# Altium PCB layout.PcbDoc (part 6 of 11)
Units mil, origin at the board's own origin, x right, y up, seen from the top; angles counter-clockwise.
Board outline 3543.31 x 3149.61 mil, 2 copper layers (Top Layer, Bottom Layer); 78 components, 73 nets, 327 pads, 143 vias.
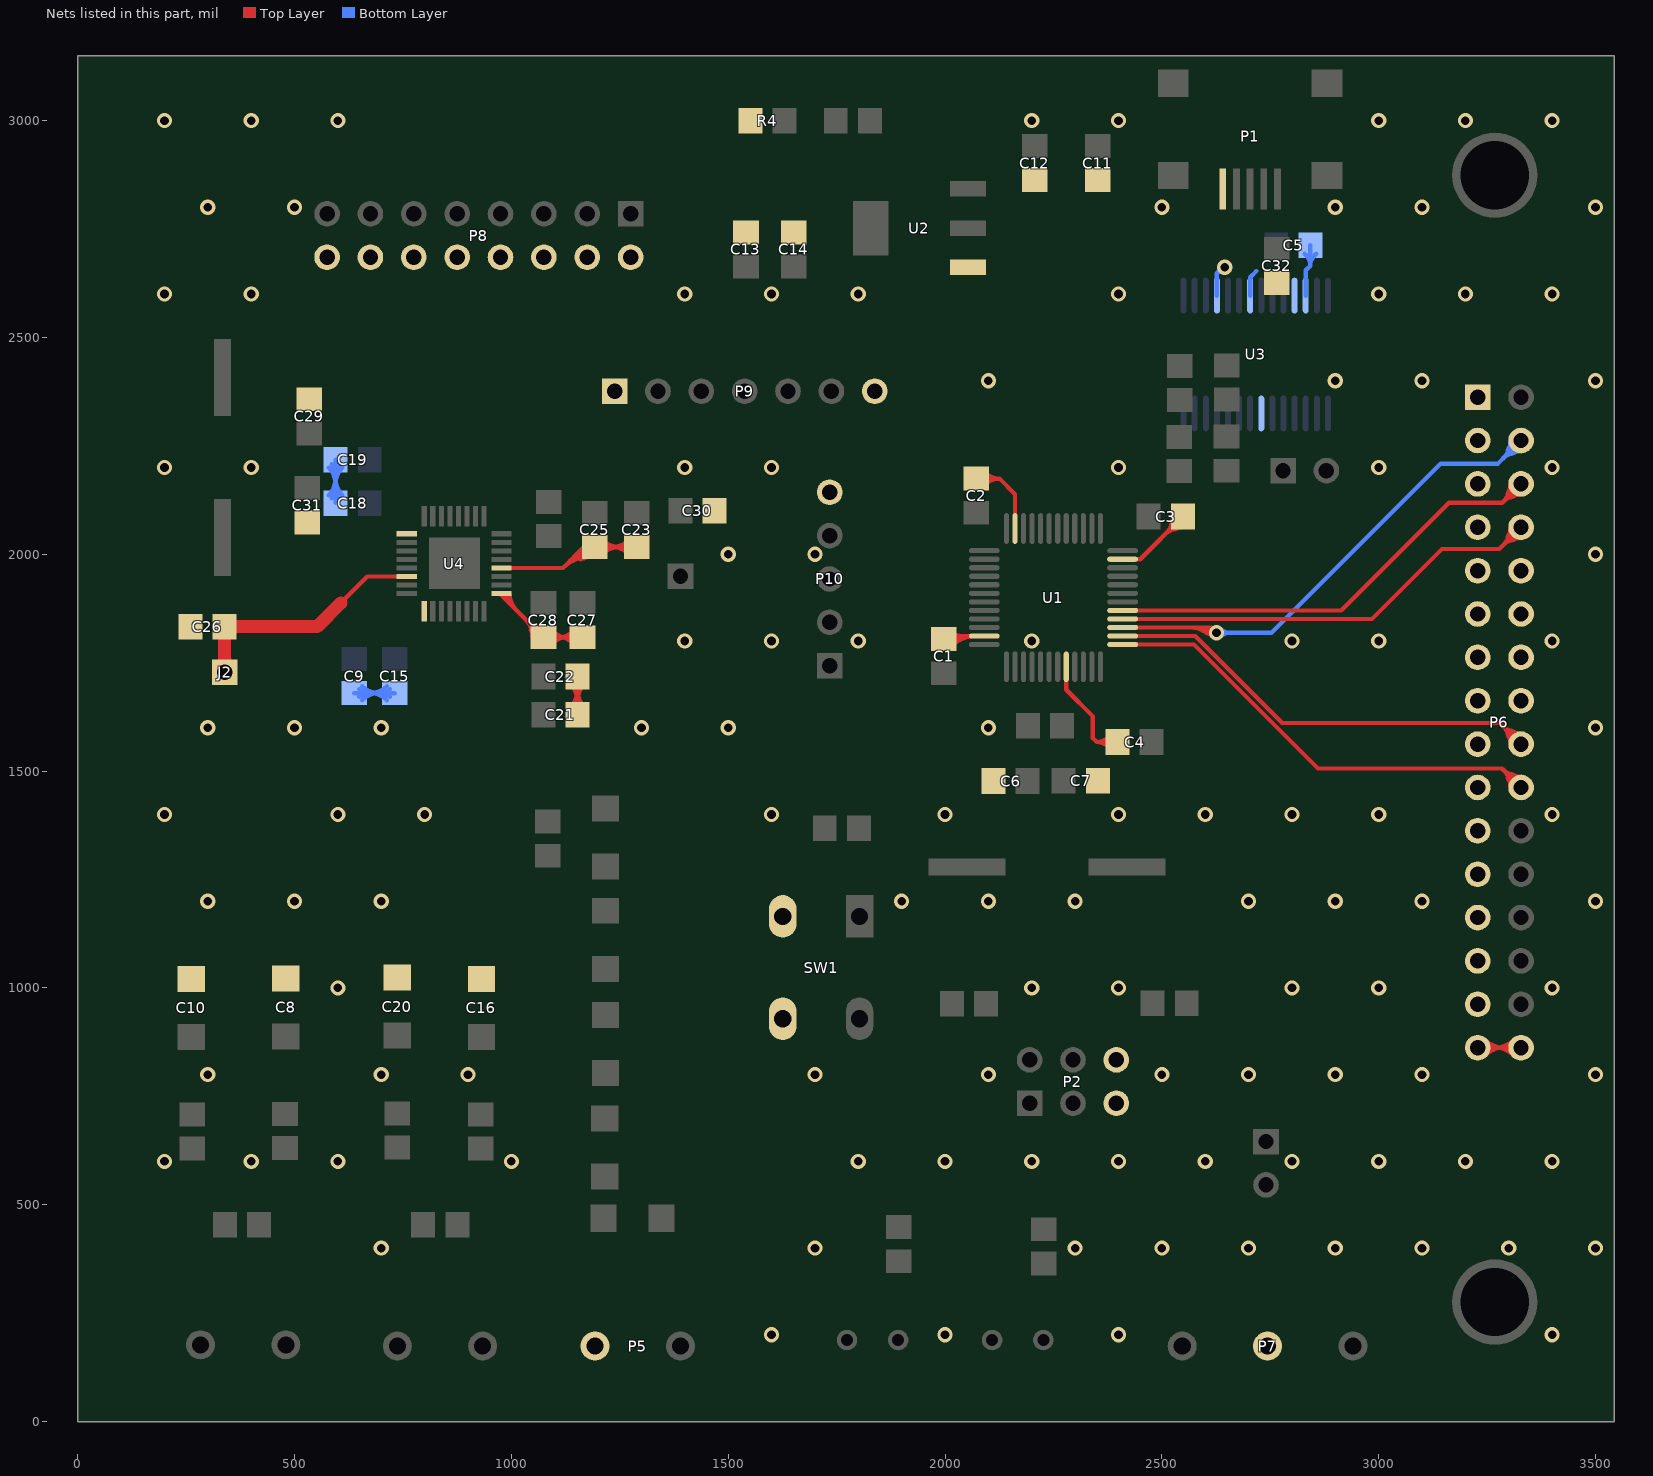
[diagram p6: the nets of this part, all layers, seen from the top]

## Via types
v1: diameter 35, hole 20, Top Layer to Bottom Layer, tented both sides, 113 vias
v2: diameter 35, hole 20, Top Layer to Bottom Layer, 28 vias
v3: diameter 35.43, hole 35.43, Top Layer to Bottom Layer, 2 vias

## Nets (pads, with @x,y where several pads share a name; then routed paths per layer and width w, separated by ;. In a path a pad name is that pad's centre, name@x,y a point inside that pad or via, vN(x,y) a via of type N, cw(c..) or ccw(c..) an arc to the next point about the centre after c; other vN are vias at no path point) (continued)
EFFEN_DOUT: P6.18 U1.14 | length 2613.7
  Top Layer w10: U1.14@2409.45,1811.42 2577.21,1811.42 2777.63,1611 3279.55,1611 P6.18@3328.35,1562.2 ; 3286.47,1604.08 cw(c3244.6,1562.2) P6.18@3303.82,1562.2 ; 3286.47,1604.08 ccw(c3328.35,1645.95) P6.18@3328.35,1586.73 ; 3286.47,1604.08 cw(c3244.6,1562.2) P6.18@3303.82,1562.2 ; 3286.47,1604.08 ccw(c3328.35,1645.95) P6.18@3328.35,1586.73 ; 3286.47,1604.08 cw(c3244.6,1562.2) P6.18@3303.82,1562.2 ; 3286.47,1604.08 ccw(c3328.35,1645.95) P6.18@3328.35,1586.73 ; 3286.47,1604.08 cw(c3244.6,1562.2) P6.18@3303.82,1562.2 ; 3286.47,1604.08 ccw(c3328.35,1645.95) P6.18@3328.35,1586.73 ; 3286.47,1604.08 cw(c3244.6,1562.2) P6.18@3303.82,1562.2 ; 3286.47,1604.08 ccw(c3328.35,1645.95) P6.18@3328.35,1586.73 ; 3297.83,1584.55 ccw(c3334.96,1594.5) P6.18@3327.25,1556.84 ; 3297.83,1584.55 ccw(c3334.96,1594.5) P6.18@3327.25,1556.84 ; 3297.83,1584.55 ccw(c3334.96,1594.5) P6.18@3327.25,1556.84 ; 3297.83,1584.55 ccw(c3334.96,1594.5) P6.18@3327.25,1556.84 ; 3297.83,1584.55 ccw(c3334.96,1594.5) P6.18@3327.25,1556.84 ; 3297.83,1584.55 ccw(c3334.96,1594.5) P6.18@3327.25,1556.84 ; 3297.83,1584.55 ccw(c3334.96,1594.5) P6.18@3327.25,1556.84 ; 3297.83,1584.55 ccw(c3334.96,1594.5) P6.18@3327.25,1556.84 ; 3297.83,1584.55 ccw(c3334.96,1594.5) P6.18@3327.25,1556.84 ; 3297.83,1584.55 ccw(c3334.96,1594.5) P6.18@3327.25,1556.84 ; 3303.55,1587 cw(c3278.75,1562.2) P6.18@3313.82,1562.2 ; 3303.55,1587 ccw(c3328.35,1611.8) P6.18@3328.35,1576.73 ; 3303.55,1587 cw(c3278.75,1562.2) P6.18@3313.82,1562.2 ; 3303.55,1587 ccw(c3328.35,1611.8) P6.18@3328.35,1576.73 ; 3303.55,1587 cw(c3278.75,1562.2) P6.18@3313.82,1562.2 ; 3303.55,1587 ccw(c3328.35,1611.8) P6.18@3328.35,1576.73 ; 3303.55,1587 cw(c3278.75,1562.2) P6.18@3313.82,1562.2 ; 3303.55,1587 ccw(c3328.35,1611.8) P6.18@3328.35,1576.73 ; 3303.55,1587 cw(c3278.75,1562.2) P6.18@3313.82,1562.2 ; 3303.55,1587 ccw(c3328.35,1611.8) P6.18@3328.35,1576.73 ; 3306,1592.72 cw(c3296.05,1555.59) P6.18@3333.71,1563.3 ; 3306,1592.72 cw(c3296.05,1555.59) P6.18@3333.71,1563.3 ; 3306,1592.72 cw(c3296.05,1555.59) P6.18@3333.71,1563.3 ; 3306,1592.72 cw(c3296.05,1555.59) P6.18@3333.71,1563.3 ; 3306,1592.72 cw(c3296.05,1555.59) P6.18@3333.71,1563.3 ; 3306,1592.72 cw(c3296.05,1555.59) P6.18@3333.71,1563.3 ; 3306,1592.72 cw(c3296.05,1555.59) P6.18@3333.71,1563.3 ; 3306,1592.72 cw(c3296.05,1555.59) P6.18@3333.71,1563.3 ; 3306,1592.72 cw(c3296.05,1555.59) P6.18@3333.71,1563.3 ; 3306,1592.72 cw(c3296.05,1555.59) P6.18@3333.71,1563.3
EFFEN_IRQ: P6.20 U1.13 | length 2647
  Top Layer w10: U1.13@2409.45,1791.73 2574.27,1791.73 2860,1506 3284.55,1506 P6.20@3328.35,1462.2 ; 3286.47,1504.08 cw(c3244.6,1462.2) P6.20@3303.82,1462.2 ; 3286.47,1504.08 ccw(c3328.35,1545.95) P6.20@3328.35,1486.73 ; 3286.47,1504.08 cw(c3244.6,1462.2) P6.20@3303.82,1462.2 ; 3286.47,1504.08 ccw(c3328.35,1545.95) P6.20@3328.35,1486.73 ; 3286.47,1504.08 cw(c3244.6,1462.2) P6.20@3303.82,1462.2 ; 3286.47,1504.08 ccw(c3328.35,1545.95) P6.20@3328.35,1486.73 ; 3286.47,1504.08 cw(c3244.6,1462.2) P6.20@3303.82,1462.2 ; 3286.47,1504.08 ccw(c3328.35,1545.95) P6.20@3328.35,1486.73 ; 3286.47,1504.08 cw(c3244.6,1462.2) P6.20@3303.82,1462.2 ; 3286.47,1504.08 ccw(c3328.35,1545.95) P6.20@3328.35,1486.73 ; 3297.83,1484.55 ccw(c3334.96,1494.5) P6.20@3327.25,1456.84 ; 3297.83,1484.55 ccw(c3334.96,1494.5) P6.20@3327.25,1456.84 ; 3297.83,1484.55 ccw(c3334.96,1494.5) P6.20@3327.25,1456.84 ; 3297.83,1484.55 ccw(c3334.96,1494.5) P6.20@3327.25,1456.84 ; 3297.83,1484.55 ccw(c3334.96,1494.5) P6.20@3327.25,1456.84 ; 3297.83,1484.55 ccw(c3334.96,1494.5) P6.20@3327.25,1456.84 ; 3297.83,1484.55 ccw(c3334.96,1494.5) P6.20@3327.25,1456.84 ; 3297.83,1484.55 ccw(c3334.96,1494.5) P6.20@3327.25,1456.84 ; 3297.83,1484.55 ccw(c3334.96,1494.5) P6.20@3327.25,1456.84 ; 3297.83,1484.55 ccw(c3334.96,1494.5) P6.20@3327.25,1456.84 ; 3303.55,1487 cw(c3278.75,1462.2) P6.20@3313.82,1462.2 ; 3303.55,1487 ccw(c3328.35,1511.8) P6.20@3328.35,1476.73 ; 3303.55,1487 cw(c3278.75,1462.2) P6.20@3313.82,1462.2 ; 3303.55,1487 ccw(c3328.35,1511.8) P6.20@3328.35,1476.73 ; 3303.55,1487 cw(c3278.75,1462.2) P6.20@3313.82,1462.2 ; 3303.55,1487 ccw(c3328.35,1511.8) P6.20@3328.35,1476.73 ; 3303.55,1487 cw(c3278.75,1462.2) P6.20@3313.82,1462.2 ; 3303.55,1487 ccw(c3328.35,1511.8) P6.20@3328.35,1476.73 ; 3303.55,1487 cw(c3278.75,1462.2) P6.20@3313.82,1462.2 ; 3303.55,1487 ccw(c3328.35,1511.8) P6.20@3328.35,1476.73 ; 3306,1492.72 cw(c3296.05,1455.59) P6.20@3333.71,1463.3 ; 3306,1492.72 cw(c3296.05,1455.59) P6.20@3333.71,1463.3 ; 3306,1492.72 cw(c3296.05,1455.59) P6.20@3333.71,1463.3 ; 3306,1492.72 cw(c3296.05,1455.59) P6.20@3333.71,1463.3 ; 3306,1492.72 cw(c3296.05,1455.59) P6.20@3333.71,1463.3 ; 3306,1492.72 cw(c3296.05,1455.59) P6.20@3333.71,1463.3 ; 3306,1492.72 cw(c3296.05,1455.59) P6.20@3333.71,1463.3 ; 3306,1492.72 cw(c3296.05,1455.59) P6.20@3333.71,1463.3 ; 3306,1492.72 cw(c3296.05,1455.59) P6.20@3333.71,1463.3 ; 3306,1492.72 cw(c3296.05,1455.59) P6.20@3333.71,1463.3
EFFEN_MISO: P6.8 U1.16 | length 2598
  Top Layer w10: U1.16@2409.45,1850.79 2984.79,1850.79 3146,2012 3278.14,2012 P6.8@3328.35,2062.2 ; 3286.47,2020.33 cw(c3328.35,1978.46) P6.8@3328.35,2037.68 ; 3286.47,2020.33 ccw(c3244.6,2062.2) P6.8@3303.82,2062.2 ; 3286.47,2020.33 cw(c3328.35,1978.46) P6.8@3328.35,2037.68 ; 3286.47,2020.33 ccw(c3244.6,2062.2) P6.8@3303.82,2062.2 ; 3286.47,2020.33 cw(c3328.35,1978.46) P6.8@3328.35,2037.68 ; 3286.47,2020.33 ccw(c3244.6,2062.2) P6.8@3303.82,2062.2 ; 3286.47,2020.33 cw(c3328.35,1978.46) P6.8@3328.35,2037.68 ; 3286.47,2020.33 ccw(c3244.6,2062.2) P6.8@3303.82,2062.2 ; 3286.47,2020.33 cw(c3328.35,1978.46) P6.8@3328.35,2037.68 ; 3286.47,2020.33 ccw(c3244.6,2062.2) P6.8@3303.82,2062.2 ; 3297.83,2039.86 cw(c3334.96,2029.91) P6.8@3327.25,2067.57 ; 3297.83,2039.86 cw(c3334.96,2029.91) P6.8@3327.25,2067.57 ; 3297.83,2039.86 cw(c3334.96,2029.91) P6.8@3327.25,2067.57 ; 3297.83,2039.86 cw(c3334.96,2029.91) P6.8@3327.25,2067.57 ; 3297.83,2039.86 cw(c3334.96,2029.91) P6.8@3327.25,2067.57 ; 3297.83,2039.86 cw(c3334.96,2029.91) P6.8@3327.25,2067.57 ; 3297.83,2039.86 cw(c3334.96,2029.91) P6.8@3327.25,2067.57 ; 3297.83,2039.86 cw(c3334.96,2029.91) P6.8@3327.25,2067.57 ; 3297.83,2039.86 cw(c3334.96,2029.91) P6.8@3327.25,2067.57 ; 3297.83,2039.86 cw(c3334.96,2029.91) P6.8@3327.25,2067.57 ; 3303.55,2037.4 cw(c3328.35,2012.6) P6.8@3328.35,2047.68 ; 3303.55,2037.4 ccw(c3278.75,2062.2) P6.8@3313.82,2062.2 ; 3303.55,2037.4 cw(c3328.35,2012.6) P6.8@3328.35,2047.68 ; 3303.55,2037.4 ccw(c3278.75,2062.2) P6.8@3313.82,2062.2 ; 3303.55,2037.4 cw(c3328.35,2012.6) P6.8@3328.35,2047.68 ; 3303.55,2037.4 ccw(c3278.75,2062.2) P6.8@3313.82,2062.2 ; 3303.55,2037.4 cw(c3328.35,2012.6) P6.8@3328.35,2047.68 ; 3303.55,2037.4 ccw(c3278.75,2062.2) P6.8@3313.82,2062.2 ; 3303.55,2037.4 cw(c3328.35,2012.6) P6.8@3328.35,2047.68 ; 3303.55,2037.4 ccw(c3278.75,2062.2) P6.8@3313.82,2062.2 ; 3306,2031.69 ccw(c3296.05,2068.82) P6.8@3333.71,2061.11 ; 3306,2031.69 ccw(c3296.05,2068.82) P6.8@3333.71,2061.11 ; 3306,2031.69 ccw(c3296.05,2068.82) P6.8@3333.71,2061.11 ; 3306,2031.69 ccw(c3296.05,2068.82) P6.8@3333.71,2061.11 ; 3306,2031.69 ccw(c3296.05,2068.82) P6.8@3333.71,2061.11 ; 3306,2031.69 ccw(c3296.05,2068.82) P6.8@3333.71,2061.11 ; 3306,2031.69 ccw(c3296.05,2068.82) P6.8@3333.71,2061.11 ; 3306,2031.69 ccw(c3296.05,2068.82) P6.8@3333.71,2061.11 ; 3306,2031.69 ccw(c3296.05,2068.82) P6.8@3333.71,2061.11 ; 3306,2031.69 ccw(c3296.05,2068.82) P6.8@3333.71,2061.11
EFFEN_MOSI: P6.6 U1.17 | length 2631.3
  Top Layer w10: U1.17@2409.45,1870.47 2913.47,1870.47 3162,2119 3285.14,2119 P6.6@3328.35,2162.2 ; 3286.47,2120.33 cw(c3328.35,2078.46) P6.6@3328.35,2137.68 ; 3286.47,2120.33 ccw(c3244.6,2162.2) P6.6@3303.82,2162.2 ; 3286.47,2120.33 cw(c3328.35,2078.46) P6.6@3328.35,2137.68 ; 3286.47,2120.33 ccw(c3244.6,2162.2) P6.6@3303.82,2162.2 ; 3286.47,2120.33 cw(c3328.35,2078.46) P6.6@3328.35,2137.68 ; 3286.47,2120.33 ccw(c3244.6,2162.2) P6.6@3303.82,2162.2 ; 3286.47,2120.33 cw(c3328.35,2078.46) P6.6@3328.35,2137.68 ; 3286.47,2120.33 ccw(c3244.6,2162.2) P6.6@3303.82,2162.2 ; 3286.47,2120.33 cw(c3328.35,2078.46) P6.6@3328.35,2137.68 ; 3286.47,2120.33 ccw(c3244.6,2162.2) P6.6@3303.82,2162.2 ; 3297.83,2139.86 cw(c3334.96,2129.91) P6.6@3327.25,2167.57 ; 3297.83,2139.86 cw(c3334.96,2129.91) P6.6@3327.25,2167.57 ; 3297.83,2139.86 cw(c3334.96,2129.91) P6.6@3327.25,2167.57 ; 3297.83,2139.86 cw(c3334.96,2129.91) P6.6@3327.25,2167.57 ; 3297.83,2139.86 cw(c3334.96,2129.91) P6.6@3327.25,2167.57 ; 3297.83,2139.86 cw(c3334.96,2129.91) P6.6@3327.25,2167.57 ; 3297.83,2139.86 cw(c3334.96,2129.91) P6.6@3327.25,2167.57 ; 3297.83,2139.86 cw(c3334.96,2129.91) P6.6@3327.25,2167.57 ; 3297.83,2139.86 cw(c3334.96,2129.91) P6.6@3327.25,2167.57 ; 3297.83,2139.86 cw(c3334.96,2129.91) P6.6@3327.25,2167.57 ; 3303.55,2137.4 cw(c3328.35,2112.6) P6.6@3328.35,2147.68 ; 3303.55,2137.4 ccw(c3278.75,2162.2) P6.6@3313.82,2162.2 ; 3303.55,2137.4 cw(c3328.35,2112.6) P6.6@3328.35,2147.68 ; 3303.55,2137.4 ccw(c3278.75,2162.2) P6.6@3313.82,2162.2 ; 3303.55,2137.4 cw(c3328.35,2112.6) P6.6@3328.35,2147.68 ; 3303.55,2137.4 ccw(c3278.75,2162.2) P6.6@3313.82,2162.2 ; 3303.55,2137.4 cw(c3328.35,2112.6) P6.6@3328.35,2147.68 ; 3303.55,2137.4 ccw(c3278.75,2162.2) P6.6@3313.82,2162.2 ; 3303.55,2137.4 cw(c3328.35,2112.6) P6.6@3328.35,2147.68 ; 3303.55,2137.4 ccw(c3278.75,2162.2) P6.6@3313.82,2162.2 ; 3306,2131.69 ccw(c3296.05,2168.82) P6.6@3333.71,2161.11 ; 3306,2131.69 ccw(c3296.05,2168.82) P6.6@3333.71,2161.11 ; 3306,2131.69 ccw(c3296.05,2168.82) P6.6@3333.71,2161.11 ; 3306,2131.69 ccw(c3296.05,2168.82) P6.6@3333.71,2161.11 ; 3306,2131.69 ccw(c3296.05,2168.82) P6.6@3333.71,2161.11 ; 3306,2131.69 ccw(c3296.05,2168.82) P6.6@3333.71,2161.11 ; 3306,2131.69 ccw(c3296.05,2168.82) P6.6@3333.71,2161.11 ; 3306,2131.69 ccw(c3296.05,2168.82) P6.6@3333.71,2161.11 ; 3306,2131.69 ccw(c3296.05,2168.82) P6.6@3333.71,2161.11 ; 3306,2131.69 ccw(c3296.05,2168.82) P6.6@3333.71,2161.11
EFFEN_SCLK: P6.4 U1.15 | length 4238.1
  Top Layer w10: U1.15@2409.45,1831.1 2613.9,1831.1 v2(2626,1819) ; 2566.61,1831.1 cw(c2566.61,1759.61) v2@2617.16,1810.16 ; 2566.61,1831.1 cw(c2566.61,1759.61) v2@2617.16,1810.16 ; 2566.61,1831.1 cw(c2566.61,1759.61) v2@2617.16,1810.16 ; 2566.61,1831.1 cw(c2566.61,1759.61) v2@2617.16,1810.16 ; 2566.61,1831.1 cw(c2566.61,1759.61) v2@2617.16,1810.16 ; 2590.75,1831.1 cw(c2590.75,1783.75) v2@2624.23,1817.23 ; 2590.75,1831.1 cw(c2590.75,1783.75) v2@2624.23,1817.23 ; 2590.75,1831.1 cw(c2590.75,1783.75) v2@2624.23,1817.23 ; 2590.75,1831.1 cw(c2590.75,1783.75) v2@2624.23,1817.23 ; 2590.75,1831.1 cw(c2590.75,1783.75) v2@2624.23,1817.23 ; 2591.15,1825.18 ccw(c2602.3,1844.5) v2@2617.49,1828.16 ; 2591.15,1825.18 ccw(c2602.3,1844.5) v2@2617.49,1828.16 ; 2591.15,1825.18 ccw(c2602.3,1844.5) v2@2617.49,1828.16 ; 2591.15,1825.18 ccw(c2602.3,1844.5) v2@2617.49,1828.16 ; 2591.15,1825.18 ccw(c2602.3,1844.5) v2@2617.49,1828.16 ; 2591.15,1825.18 ccw(c2602.3,1844.5) v2@2617.49,1828.16 ; 2591.15,1825.18 ccw(c2602.3,1844.5) v2@2617.49,1828.16 ; 2591.15,1825.18 ccw(c2602.3,1844.5) v2@2617.49,1828.16 ; 2591.15,1825.18 ccw(c2602.3,1844.5) v2@2617.49,1828.16 ; 2591.15,1825.18 ccw(c2602.3,1844.5) v2@2617.49,1828.16 ; 2602.87,1818.41 ccw(c2611.95,1834.12) v2@2624.3,1820.83 ; 2602.87,1818.41 ccw(c2611.95,1834.12) v2@2624.3,1820.83 ; 2602.87,1818.41 ccw(c2611.95,1834.12) v2@2624.3,1820.83 ; 2602.87,1818.41 ccw(c2611.95,1834.12) v2@2624.3,1820.83 ; 2602.87,1818.41 ccw(c2611.95,1834.12) v2@2624.3,1820.83 ; 2602.87,1818.41 ccw(c2611.95,1834.12) v2@2624.3,1820.83 ; 2602.87,1818.41 ccw(c2611.95,1834.12) v2@2624.3,1820.83 ; 2602.87,1818.41 ccw(c2611.95,1834.12) v2@2624.3,1820.83 ; 2602.87,1818.41 ccw(c2611.95,1834.12) v2@2624.3,1820.83 ; 2602.87,1818.41 ccw(c2611.95,1834.12) v2@2624.3,1820.83 ; 2604.21,1828.79 cw(c2593.94,1811) v2@2613.87,1815.97 ; 2604.21,1828.79 ccw(c2611.16,1840.82) v2@2618.97,1829.34 ; 2604.21,1828.79 cw(c2593.94,1811) v2@2613.87,1815.97 ; 2604.21,1828.79 ccw(c2611.16,1840.82) v2@2618.97,1829.34 ; 2604.21,1828.79 cw(c2593.94,1811) v2@2613.87,1815.97 ; 2604.21,1828.79 ccw(c2611.16,1840.82) v2@2618.97,1829.34 ; 2604.21,1828.79 cw(c2593.94,1811) v2@2613.87,1815.97 ; 2604.21,1828.79 ccw(c2611.16,1840.82) v2@2618.97,1829.34 ; 2604.21,1828.79 cw(c2593.94,1811) v2@2613.87,1815.97 ; 2604.21,1828.79 ccw(c2611.16,1840.82) v2@2618.97,1829.34 ; 2604.21,1828.79 cw(c2593.94,1811) v2@2613.87,1815.97 ; 2604.21,1828.79 ccw(c2611.16,1840.82) v2@2618.97,1829.34 ; 2604.21,1828.79 cw(c2593.94,1811) v2@2613.87,1815.97 ; 2604.21,1828.79 ccw(c2611.16,1840.82) v2@2618.97,1829.34 ; 2604.21,1828.79 cw(c2593.94,1811) v2@2613.87,1815.97 ; 2604.21,1828.79 ccw(c2611.16,1840.82) v2@2618.97,1829.34 ; 2604.21,1828.79 cw(c2593.94,1811) v2@2613.87,1815.97 ; 2604.21,1828.79 ccw(c2611.16,1840.82) v2@2618.97,1829.34 ; 2604.21,1828.79 cw(c2593.94,1811) v2@2613.87,1815.97 ; 2604.21,1828.79 ccw(c2611.16,1840.82) v2@2618.97,1829.34
  Bottom Layer w10: v2(2626,1819) 2753,1819 3143,2209 3275.14,2209 P6.4@3328.35,2262.2 ; v2@2634.84,1810.16 cw(c2656.18,1788.82) 2656.18,1819 ; v2@2634.84,1810.16 cw(c2656.18,1788.82) 2656.18,1819 ; v2@2634.84,1810.16 cw(c2656.18,1788.82) 2656.18,1819 ; v2@2634.84,1810.16 cw(c2656.18,1788.82) 2656.18,1819 ; v2@2634.84,1810.16 cw(c2656.18,1788.82) 2656.18,1819 ; v2@2634.84,1827.84 ccw(c2656.18,1849.18) 2656.18,1819 ; v2@2634.84,1827.84 ccw(c2656.18,1849.18) 2656.18,1819 ; v2@2634.84,1827.84 ccw(c2656.18,1849.18) 2656.18,1819 ; v2@2634.84,1827.84 ccw(c2656.18,1849.18) 2656.18,1819 ; v2@2634.84,1827.84 ccw(c2656.18,1849.18) 2656.18,1819 ; 3286.47,2220.33 cw(c3328.35,2178.46) P6.4@3328.35,2237.68 ; 3286.47,2220.33 ccw(c3244.6,2262.2) P6.4@3303.82,2262.2 ; 3286.47,2220.33 cw(c3328.35,2178.46) P6.4@3328.35,2237.68 ; 3286.47,2220.33 ccw(c3244.6,2262.2) P6.4@3303.82,2262.2 ; 3286.47,2220.33 cw(c3328.35,2178.46) P6.4@3328.35,2237.68 ; 3286.47,2220.33 ccw(c3244.6,2262.2) P6.4@3303.82,2262.2 ; 3286.47,2220.33 cw(c3328.35,2178.46) P6.4@3328.35,2237.68 ; 3286.47,2220.33 ccw(c3244.6,2262.2) P6.4@3303.82,2262.2 ; 3286.47,2220.33 cw(c3328.35,2178.46) P6.4@3328.35,2237.68 ; 3286.47,2220.33 ccw(c3244.6,2262.2) P6.4@3303.82,2262.2 ; 3297.83,2239.86 cw(c3334.96,2229.91) P6.4@3327.25,2267.57 ; 3297.83,2239.86 cw(c3334.96,2229.91) P6.4@3327.25,2267.57 ; 3297.83,2239.86 cw(c3334.96,2229.91) P6.4@3327.25,2267.57 ; 3297.83,2239.86 cw(c3334.96,2229.91) P6.4@3327.25,2267.57 ; 3297.83,2239.86 cw(c3334.96,2229.91) P6.4@3327.25,2267.57 ; 3297.83,2239.86 cw(c3334.96,2229.91) P6.4@3327.25,2267.57 ; 3297.83,2239.86 cw(c3334.96,2229.91) P6.4@3327.25,2267.57 ; 3297.83,2239.86 cw(c3334.96,2229.91) P6.4@3327.25,2267.57 ; 3297.83,2239.86 cw(c3334.96,2229.91) P6.4@3327.25,2267.57 ; 3297.83,2239.86 cw(c3334.96,2229.91) P6.4@3327.25,2267.57 ; 3303.55,2237.4 cw(c3328.35,2212.6) P6.4@3328.35,2247.68 ; 3303.55,2237.4 ccw(c3278.75,2262.2) P6.4@3313.82,2262.2 ; 3303.55,2237.4 cw(c3328.35,2212.6) P6.4@3328.35,2247.68 ; 3303.55,2237.4 ccw(c3278.75,2262.2) P6.4@3313.82,2262.2 ; 3303.55,2237.4 cw(c3328.35,2212.6) P6.4@3328.35,2247.68 ; 3303.55,2237.4 ccw(c3278.75,2262.2) P6.4@3313.82,2262.2 ; 3303.55,2237.4 cw(c3328.35,2212.6) P6.4@3328.35,2247.68 ; 3303.55,2237.4 ccw(c3278.75,2262.2) P6.4@3313.82,2262.2 ; 3303.55,2237.4 cw(c3328.35,2212.6) P6.4@3328.35,2247.68 ; 3303.55,2237.4 ccw(c3278.75,2262.2) P6.4@3313.82,2262.2 ; 3306,2231.69 ccw(c3296.05,2268.82) P6.4@3333.71,2261.11 ; 3306,2231.69 ccw(c3296.05,2268.82) P6.4@3333.71,2261.11 ; 3306,2231.69 ccw(c3296.05,2268.82) P6.4@3333.71,2261.11 ; 3306,2231.69 ccw(c3296.05,2268.82) P6.4@3333.71,2261.11 ; 3306,2231.69 ccw(c3296.05,2268.82) P6.4@3333.71,2261.11 ; 3306,2231.69 ccw(c3296.05,2268.82) P6.4@3333.71,2261.11 ; 3306,2231.69 ccw(c3296.05,2268.82) P6.4@3333.71,2261.11 ; 3306,2231.69 ccw(c3296.05,2268.82) P6.4@3333.71,2261.11 ; 3306,2231.69 ccw(c3296.05,2268.82) P6.4@3333.71,2261.11 ; 3306,2231.69 ccw(c3296.05,2268.82) P6.4@3333.71,2261.11
GND: C1.1 C2.1 C3.1 C4.1 C5.2 C6.2 C7.2 C8.2 C9.2 C10.1 C11.1 C12.1 C13.1 C14.1 C15.2 C16.2 C18.2 C19.2 C20.1 C21.2 C22.2 C23.2 C25.2 C26.2 C27.2 C28.2 C29.2 C30.2 C31.2 C32.1 P1.5 P2.5 P2.6 P5.1 P6.1 P6.3 P6.5 P6.7 P6.9 P6.10 P6.11 P6.12 P6.13 P6.14 P6.15 P6.16 P6.17 P6.19 P6.21 P6.23 P6.25 P6.27 P6.29 P6.31 P6.32 P7.2 P8.2 P8.4 P8.6 P8.8 P8.10 P8.12 P8.14 P8.16 P9.1 P9.7 P10.5 R4.1 SW1.3 SW1.4 U1.8 U1.23 U1.35 U1.47 U2.1 U3.7 U3.18 U3.21 U3.25 U3.26 U4.1 U4.9 U4.17 U4.20 | length 17708.6
  Top Layer w10: U4.17@977.23,1909.42 977.23,1905.4 C28.2@1074,1808.63 C27.2@1164,1808.63 ; U4.20@977.23,1968.47 1118.91,1968.47 1167.07,2016.63 C25.2@1192,2016.63 C23.2@1289,2016.63 ; C21.2@1152.37,1630 C22.2@1152.37,1718 ; C1.1@1997,1804.37 2004.05,1811.42 U1.47@2090.55,1811.42 ; C2.1@2072,2174.37 2125.63,2174.37 ; U1.35@2161.42,2059.45 2161.42,2138.58 2125.63,2174.37 ; U1.8@2279.53,1740.55 2279.53,1687.47 2341,1626 2341,1576 2350,1567 ; C4.1@2397.63,1567 2350,1567 ; U1.23@2409.45,1988.58 2449.95,1988.58 C3.1@2548.37,2087 ; P6.31@3228.35,862.2 P6.32@3328.35,862.2 ; U4.17@975.85,1909.42 ccw(c982.22,1909.42) U4.17@977.72,1904.91 ; U4.17@975.85,1909.42 ccw(c982.22,1909.42) U4.17@977.72,1904.91 ; U4.17@975.85,1909.42 ccw(c982.22,1909.42) U4.17@977.72,1904.91 ; U4.17@975.85,1909.42 ccw(c982.22,1909.42) U4.17@977.72,1904.91 ; U4.17@975.85,1909.42 ccw(c982.22,1909.42) U4.17@977.72,1904.91 ; U4.17@985.85,1909.42 ccw(c1016.36,1909.42) 994.79,1887.84 ; U4.17@985.85,1909.42 ccw(c1016.36,1909.42) 994.79,1887.84 ; U4.17@985.85,1909.42 ccw(c1016.36,1909.42) 994.79,1887.84 ; U4.17@985.85,1909.42 ccw(c1016.36,1909.42) 994.79,1887.84 ; U4.17@985.85,1909.42 ccw(c1016.36,1909.42) 994.79,1887.84 ; U4.17@995.85,1909.42 ccw(c1050.5,1909.42) 1011.86,1870.77 ; U4.17@995.85,1909.42 ccw(c1050.5,1909.42) 1011.86,1870.77 ; U4.17@995.85,1909.42 ccw(c1050.5,1909.42) 1011.86,1870.77 ; U4.17@995.85,1909.42 ccw(c1050.5,1909.42) 1011.86,1870.77 ; U4.17@995.85,1909.42 ccw(c1050.5,1909.42) 1011.86,1870.77 ; 1032.13,1850.5 cw(c990.26,1808.63) C28.2@1049.47,1808.63 ; 1032.13,1850.5 cw(c990.26,1808.63) C28.2@1049.47,1808.63 ; 1032.13,1850.5 cw(c990.26,1808.63) C28.2@1049.47,1808.63 ; 1032.13,1850.5 cw(c990.26,1808.63) C28.2@1049.47,1808.63 ; 1032.13,1850.5 cw(c990.26,1808.63) C28.2@1049.47,1808.63 ; 1036.88,1845.75 ccw(c1072.03,1880.9) C28.2@1072.03,1831.19 ; 1036.88,1845.75 ccw(c1072.03,1880.9) C28.2@1072.03,1831.19 ; 1036.88,1845.75 ccw(c1072.03,1880.9) C28.2@1072.03,1831.19 ; 1036.88,1845.75 ccw(c1072.03,1880.9) C28.2@1072.03,1831.19 ; 1036.88,1845.75 ccw(c1072.03,1880.9) C28.2@1072.03,1831.19 ; 1040.44,1842.36 ccw(c1082.67,1853.67) C28.2@1072.62,1811.12 ; 1040.44,1842.36 ccw(c1082.67,1853.67) C28.2@1072.62,1811.12 ; 1040.44,1842.36 ccw(c1082.67,1853.67) C28.2@1072.62,1811.12 ; 1040.44,1842.36 ccw(c1082.67,1853.67) C28.2@1072.62,1811.12 ; 1040.44,1842.36 ccw(c1082.67,1853.67) C28.2@1072.62,1811.12 ; 1040.44,1842.36 ccw(c1082.67,1853.67) C28.2@1072.62,1811.12 ; 1040.44,1842.36 ccw(c1082.67,1853.67) C28.2@1072.62,1811.12 ; 1040.44,1842.36 ccw(c1082.67,1853.67) C28.2@1072.62,1811.12 ; 1040.44,1842.36 ccw(c1082.67,1853.67) C28.2@1072.62,1811.12 ; 1040.44,1842.36 ccw(c1082.67,1853.67) C28.2@1072.62,1811.12 ; C28.2@1044.77,1826.19 ccw(c1078.3,1835.17) C28.2@1070.32,1801.39 ; C28.2@1044.77,1826.19 ccw(c1078.3,1835.17) C28.2@1070.32,1801.39 ; C28.2@1044.77,1826.19 ccw(c1078.3,1835.17) C28.2@1070.32,1801.39 ; C28.2@1044.77,1826.19 ccw(c1078.3,1835.17) C28.2@1070.32,1801.39 ; C28.2@1044.77,1826.19 ccw(c1078.3,1835.17) C28.2@1070.32,1801.39 ; C28.2@1044.77,1826.19 ccw(c1078.3,1835.17) C28.2@1070.32,1801.39 ; C28.2@1044.77,1826.19 ccw(c1078.3,1835.17) C28.2@1070.32,1801.39 ; C28.2@1044.77,1826.19 ccw(c1078.3,1835.17) C28.2@1070.32,1801.39 ; C28.2@1044.77,1826.19 ccw(c1078.3,1835.17) C28.2@1070.32,1801.39 ; C28.2@1044.77,1826.19 ccw(c1078.3,1835.17) C28.2@1070.32,1801.39 ; C28.2@1049.2,1833.43 cw(c1024.4,1808.63) C28.2@1059.47,1808.63 ; C28.2@1049.2,1833.43 cw(c1024.4,1808.63) C28.2@1059.47,1808.63 ; C28.2@1049.2,1833.43 cw(c1024.4,1808.63) C28.2@1059.47,1808.63 ; C28.2@1049.2,1833.43 cw(c1024.4,1808.63) C28.2@1059.47,1808.63 ; C28.2@1049.2,1833.43 cw(c1024.4,1808.63) C28.2@1059.47,1808.63 ; C28.2@1056.01,1835.48 cw(c1047.69,1804.44) C28.2@1079.36,1809.89 ; C28.2@1056.01,1835.48 cw(c1047.69,1804.44) C28.2@1079.36,1809.89 ; C28.2@1056.01,1835.48 cw(c1047.69,1804.44) C28.2@1079.36,1809.89 ; C28.2@1056.01,1835.48 cw(c1047.69,1804.44) C28.2@1079.36,1809.89 ; C28.2@1056.01,1835.48 cw(c1047.69,1804.44) C28.2@1079.36,1809.89 ; C28.2@1056.01,1835.48 cw(c1047.69,1804.44) C28.2@1079.36,1809.89 ; C28.2@1056.01,1835.48 cw(c1047.69,1804.44) C28.2@1079.36,1809.89 ; C28.2@1056.01,1835.48 cw(c1047.69,1804.44) C28.2@1079.36,1809.89 ; C28.2@1056.01,1835.48 cw(c1047.69,1804.44) C28.2@1079.36,1809.89 ; C28.2@1056.01,1835.48 cw(c1047.69,1804.44) C28.2@1079.36,1809.89 ; C28.2@1084.85,1799.75 cw(c1106.29,1778.31) 1106.29,1808.63 ; C28.2@1084.85,1799.75 cw(c1106.29,1778.31) 1106.29,1808.63 ; C28.2@1084.85,1799.75 cw(c1106.29,1778.31) 1106.29,1808.63 ; C28.2@1084.85,1799.75 cw(c1106.29,1778.31) 1106.29,1808.63 ; C28.2@1084.85,1799.75 cw(c1106.29,1778.31) 1106.29,1808.63 ; C28.2@1084.85,1817.51 ccw(c1106.29,1838.95) 1106.29,1808.63 ; C28.2@1084.85,1817.51 ccw(c1106.29,1838.95) 1106.29,1808.63 ; C28.2@1084.85,1817.51 ccw(c1106.29,1838.95) 1106.29,1808.63 ; C28.2@1084.85,1817.51 ccw(c1106.29,1838.95) 1106.29,1808.63 ; C28.2@1084.85,1817.51 ccw(c1106.29,1838.95) 1106.29,1808.63 ; C28.2@1091.92,1792.68 cw(c1130.43,1754.17) 1130.43,1808.63 ; C28.2@1091.92,1792.68 cw(c1130.43,1754.17) 1130.43,1808.63 ; C28.2@1091.92,1792.68 cw(c1130.43,1754.17) 1130.43,1808.63 ; C28.2@1091.92,1792.68 cw(c1130.43,1754.17) 1130.43,1808.63 ; C28.2@1091.92,1792.68 cw(c1130.43,1754.17) 1130.43,1808.63 ; C28.2@1091.92,1824.58 ccw(c1130.43,1863.09) 1130.43,1808.63 ; C28.2@1091.92,1824.58 ccw(c1130.43,1863.09) 1130.43,1808.63 ; C28.2@1091.92,1824.58 ccw(c1130.43,1863.09) 1130.43,1808.63 ; C28.2@1091.92,1824.58 ccw(c1130.43,1863.09) 1130.43,1808.63 ; C28.2@1091.92,1824.58 ccw(c1130.43,1863.09) 1130.43,1808.63 ; 1107.57,1808.63 cw(c1107.57,1754.17) C27.2@1146.08,1792.68 ; 1107.57,1808.63 ccw(c1107.57,1863.09) C27.2@1146.08,1824.58 ; 1107.57,1808.63 cw(c1107.57,1754.17) C27.2@1146.08,1792.68 ; 1107.57,1808.63 ccw(c1107.57,1863.09) C27.2@1146.08,1824.58 ; 1107.57,1808.63 cw(c1107.57,1754.17) C27.2@1146.08,1792.68 ; 1107.57,1808.63 ccw(c1107.57,1863.09) C27.2@1146.08,1824.58 ; 1107.57,1808.63 cw(c1107.57,1754.17) C27.2@1146.08,1792.68 ; 1107.57,1808.63 ccw(c1107.57,1863.09) C27.2@1146.08,1824.58 ; 1107.57,1808.63 cw(c1107.57,1754.17) C27.2@1146.08,1792.68 ; 1107.57,1808.63 ccw(c1107.57,1863.09) C27.2@1146.08,1824.58 ; 1118.92,1968.48 cw(c1181.5,1905.89) C25.2@1188.3,1994.14 ; 1118.92,1968.48 cw(c1181.5,1905.89) C25.2@1188.3,1994.14 ; 1118.92,1968.48 cw(c1181.5,1905.89) C25.2@1188.3,1994.14 ; 1118.92,1968.48 cw(c1181.5,1905.89) C25.2@1188.3,1994.14 ; 1118.92,1968.48 cw(c1181.5,1905.89) C25.2@1188.3,1994.14 ; 1131.71,1808.63 cw(c1131.71,1778.31) C27.2@1153.15,1799.75 ; 1131.71,1808.63 ccw(c1131.71,1838.95) C27.2@1153.15,1817.51 ; 1131.71,1808.63 cw(c1131.71,1778.31) C27.2@1153.15,1799.75 ; 1131.71,1808.63 ccw(c1131.71,1838.95) C27.2@1153.15,1817.51 ; 1131.71,1808.63 cw(c1131.71,1778.31) C27.2@1153.15,1799.75 ; 1131.71,1808.63 ccw(c1131.71,1838.95) C27.2@1153.15,1817.51 ; 1131.71,1808.63 cw(c1131.71,1778.31) C27.2@1153.15,1799.75 ; 1131.71,1808.63 ccw(c1131.71,1838.95) C27.2@1153.15,1817.51 ; 1131.71,1808.63 cw(c1131.71,1778.31) C27.2@1153.15,1799.75 ; 1131.71,1808.63 ccw(c1131.71,1838.95) C27.2@1153.15,1817.51 ; 1134.29,1983.85 cw(c1183.7,1934.44) C25.2@1189.07,2004.11 ; 1134.29,1983.85 cw(c1183.7,1934.44) C25.2@1189.07,2004.11 ; 1134.29,1983.85 cw(c1183.7,1934.44) C25.2@1189.07,2004.11 ; 1134.29,1983.85 cw(c1183.7,1934.44) C25.2@1189.07,2004.11 ; 1134.29,1983.85 cw(c1183.7,1934.44) C25.2@1189.07,2004.11 ; C21.2@1136.42,1647.92 ccw(c1097.91,1686.43) 1152.37,1686.43 ; C21.2@1136.42,1647.92 ccw(c1097.91,1686.43) 1152.37,1686.43 ; C21.2@1136.42,1647.92 ccw(c1097.91,1686.43) 1152.37,1686.43 ; C21.2@1136.42,1647.92 ccw(c1097.91,1686.43) 1152.37,1686.43 ; C21.2@1136.42,1647.92 ccw(c1097.91,1686.43) 1152.37,1686.43 ; C22.2@1136.42,1700.08 cw(c1097.91,1661.57) 1152.37,1661.57 ; C22.2@1136.42,1700.08 cw(c1097.91,1661.57) 1152.37,1661.57 ; C22.2@1136.42,1700.08 cw(c1097.91,1661.57) 1152.37,1661.57 ; C22.2@1136.42,1700.08 cw(c1097.91,1661.57) 1152.37,1661.57 ; C22.2@1136.42,1700.08 cw(c1097.91,1661.57) 1152.37,1661.57 ; C21.2@1143.49,1640.85 ccw(c1122.05,1662.29) 1152.37,1662.29 ; C21.2@1143.49,1640.85 ccw(c1122.05,1662.29) 1152.37,1662.29 ; C21.2@1143.49,1640.85 ccw(c1122.05,1662.29) 1152.37,1662.29 ; C21.2@1143.49,1640.85 ccw(c1122.05,1662.29) 1152.37,1662.29 ; C21.2@1143.49,1640.85 ccw(c1122.05,1662.29) 1152.37,1662.29 ; C22.2@1143.49,1707.15 cw(c1122.05,1685.71) 1152.37,1685.71 ; C22.2@1143.49,1707.15 cw(c1122.05,1685.71) 1152.37,1685.71 ; C22.2@1143.49,1707.15 cw(c1122.05,1685.71) 1152.37,1685.71 ; C22.2@1143.49,1707.15 cw(c1122.05,1685.71) 1152.37,1685.71 ; C22.2@1143.49,1707.15 cw(c1122.05,1685.71) 1152.37,1685.71 ; 1149.66,1999.22 cw(c1185.9,1962.98) C25.2@1189.84,2014.08 ; 1149.66,1999.22 cw(c1185.9,1962.98) C25.2@1189.84,2014.08 ; 1149.66,1999.22 cw(c1185.9,1962.98) C25.2@1189.84,2014.08 ; 1149.66,1999.22 cw(c1185.9,1962.98) C25.2@1189.84,2014.08 ; 1149.66,1999.22 cw(c1185.9,1962.98) C25.2@1189.84,2014.08 ; 1152.37,1661.57 cw(c1206.83,1661.57) C22.2@1168.32,1700.08 ; 1152.37,1661.57 cw(c1206.83,1661.57) C22.2@1168.32,1700.08 ; 1152.37,1661.57 cw(c1206.83,1661.57) C22.2@1168.32,1700.08 ; 1152.37,1661.57 cw(c1206.83,1661.57) C22.2@1168.32,1700.08 ; 1152.37,1661.57 cw(c1206.83,1661.57) C22.2@1168.32,1700.08 ; 1152.37,1662.29 ccw(c1182.69,1662.29) C21.2@1161.25,1640.85 ; 1152.37,1662.29 ccw(c1182.69,1662.29) C21.2@1161.25,1640.85 ; 1152.37,1662.29 ccw(c1182.69,1662.29) C21.2@1161.25,1640.85 ; 1152.37,1662.29 ccw(c1182.69,1662.29) C21.2@1161.25,1640.85 ; 1152.37,1662.29 ccw(c1182.69,1662.29) C21.2@1161.25,1640.85 ; 1152.37,1685.71 cw(c1182.69,1685.71) C22.2@1161.25,1707.15 ; 1152.37,1685.71 cw(c1182.69,1685.71) C22.2@1161.25,1707.15 ; 1152.37,1685.71 cw(c1182.69,1685.71) C22.2@1161.25,1707.15 ; 1152.37,1685.71 cw(c1182.69,1685.71) C22.2@1161.25,1707.15 ; 1152.37,1685.71 cw(c1182.69,1685.71) C22.2@1161.25,1707.15 ; 1152.37,1686.43 ccw(c1206.83,1686.43) C21.2@1168.32,1647.92 ; 1152.37,1686.43 ccw(c1206.83,1686.43) C21.2@1168.32,1647.92 ; 1152.37,1686.43 ccw(c1206.83,1686.43) C21.2@1168.32,1647.92 ; 1152.37,1686.43 ccw(c1206.83,1686.43) C21.2@1168.32,1647.92 ; 1152.37,1686.43 ccw(c1206.83,1686.43) C21.2@1168.32,1647.92 ; 1159.99,1988.84 ccw(c1149.61,2044.31) C25.2@1196.17,2012.43 ; 1159.99,1988.84 ccw(c1149.61,2044.31) C25.2@1196.17,2012.43 ; 1159.99,1988.84 ccw(c1149.61,2044.31) C25.2@1196.17,2012.43 ; 1159.99,1988.84 ccw(c1149.61,2044.31) C25.2@1196.17,2012.43 ; 1159.99,1988.84 ccw(c1149.61,2044.31) C25.2@1196.17,2012.43 ; 1159.99,1988.84 ccw(c1149.61,2044.31) C25.2@1196.17,2012.43 ; 1159.99,1988.84 ccw(c1149.61,2044.31) C25.2@1196.17,2012.43 ; 1159.99,1988.84 ccw(c1149.61,2044.31) C25.2@1196.17,2012.43 ; 1159.99,1988.84 ccw(c1149.61,2044.31) C25.2@1196.17,2012.43 ; 1159.99,1988.84 ccw(c1149.61,2044.31) C25.2@1196.17,2012.43 ; C25.2@1162.83,1999.2 ccw(c1156.34,2033.9) C25.2@1187.75,2017.8 ; C25.2@1162.83,1999.2 ccw(c1156.34,2033.9) C25.2@1187.75,2017.8 ; C25.2@1162.83,1999.2 ccw(c1156.34,2033.9) C25.2@1187.75,2017.8 ; C25.2@1162.83,1999.2 ccw(c1156.34,2033.9) C25.2@1187.75,2017.8 ; C25.2@1162.83,1999.2 ccw(c1156.34,2033.9) C25.2@1187.75,2017.8 ; C25.2@1162.83,1999.2 ccw(c1156.34,2033.9) C25.2@1187.75,2017.8 ; C25.2@1162.83,1999.2 ccw(c1156.34,2033.9) C25.2@1187.75,2017.8 ; C25.2@1162.83,1999.2 ccw(c1156.34,2033.9) C25.2@1187.75,2017.8 ; C25.2@1162.83,1999.2 ccw(c1156.34,2033.9) C25.2@1187.75,2017.8 ; C25.2@1162.83,1999.2 ccw(c1156.34,2033.9) C25.2@1187.75,2017.8 ; C25.2@1167.52,2000.08 cw(c1169.91,1987.25) C25.2@1177.29,1998.02 ; C25.2@1167.52,2000.08 cw(c1169.91,1987.25) C25.2@1177.29,1998.02 ; C25.2@1167.52,2000.08 cw(c1169.91,1987.25) C25.2@1177.29,1998.02 ; C25.2@1167.52,2000.08 cw(c1169.91,1987.25) C25.2@1177.29,1998.02 ; C25.2@1167.52,2000.08 cw(c1169.91,1987.25) C25.2@1177.29,1998.02 ; C25.2@1167.52,2000.08 cw(c1169.91,1987.25) C25.2@1177.29,1998.02 ; C25.2@1167.52,2000.08 cw(c1169.91,1987.25) C25.2@1177.29,1998.02 ; C25.2@1167.52,2000.08 cw(c1169.91,1987.25) C25.2@1177.29,1998.02 ; C25.2@1167.52,2000.08 cw(c1169.91,1987.25) C25.2@1177.29,1998.02 ; C25.2@1167.52,2000.08 cw(c1169.91,1987.25) C25.2@1177.29,1998.02 ; C25.2@1202.85,2007.75 cw(c1224.29,1986.31) 1224.29,2016.63 ; C25.2@1202.85,2007.75 cw(c1224.29,1986.31) 1224.29,2016.63 ; C25.2@1202.85,2007.75 cw(c1224.29,1986.31) 1224.29,2016.63 ; C25.2@1202.85,2007.75 cw(c1224.29,1986.31) 1224.29,2016.63 ; C25.2@1202.85,2007.75 cw(c1224.29,1986.31) 1224.29,2016.63 ; C25.2@1202.85,2025.51 ccw(c1224.29,2046.95) 1224.29,2016.63 ; C25.2@1202.85,2025.51 ccw(c1224.29,2046.95) 1224.29,2016.63 ; C25.2@1202.85,2025.51 ccw(c1224.29,2046.95) 1224.29,2016.63 ; C25.2@1202.85,2025.51 ccw(c1224.29,2046.95) 1224.29,2016.63 ; C25.2@1202.85,2025.51 ccw(c1224.29,2046.95) 1224.29,2016.63 ; C25.2@1209.92,2000.68 cw(c1248.43,1962.17) 1248.43,2016.63 ; C25.2@1209.92,2000.68 cw(c1248.43,1962.17) 1248.43,2016.63 ; C25.2@1209.92,2000.68 cw(c1248.43,1962.17) 1248.43,2016.63 ; C25.2@1209.92,2000.68 cw(c1248.43,1962.17) 1248.43,2016.63 ; C25.2@1209.92,2000.68 cw(c1248.43,1962.17) 1248.43,2016.63 ; C25.2@1209.92,2032.58 ccw(c1248.43,2071.09) 1248.43,2016.63 ; C25.2@1209.92,2032.58 ccw(c1248.43,2071.09) 1248.43,2016.63 ; C25.2@1209.92,2032.58 ccw(c1248.43,2071.09) 1248.43,2016.63 ; C25.2@1209.92,2032.58 ccw(c1248.43,2071.09) 1248.43,2016.63 ; C25.2@1209.92,2032.58 ccw(c1248.43,2071.09) 1248.43,2016.63 ; 1232.57,2016.63 cw(c1232.57,1962.17) C23.2@1271.08,2000.68 ; 1232.57,2016.63 ccw(c1232.57,2071.09) C23.2@1271.08,2032.58 ; 1232.57,2016.63 cw(c1232.57,1962.17) C23.2@1271.08,2000.68 ; 1232.57,2016.63 ccw(c1232.57,2071.09) C23.2@1271.08,2032.58 ; 1232.57,2016.63 cw(c1232.57,1962.17) C23.2@1271.08,2000.68 ; 1232.57,2016.63 ccw(c1232.57,2071.09) C23.2@1271.08,2032.58 ; 1232.57,2016.63 cw(c1232.57,1962.17) C23.2@1271.08,2000.68 ; 1232.57,2016.63 ccw(c1232.57,2071.09) C23.2@1271.08,2032.58 ; 1232.57,2016.63 cw(c1232.57,1962.17) C23.2@1271.08,2000.68 ; 1232.57,2016.63 ccw(c1232.57,2071.09) C23.2@1271.08,2032.58 ; 1256.71,2016.63 cw(c1256.71,1986.31) C23.2@1278.15,2007.75 ; 1256.71,2016.63 ccw(c1256.71,2046.95) C23.2@1278.15,2025.51 ; 1256.71,2016.63 cw(c1256.71,1986.31) C23.2@1278.15,2007.75 ; 1256.71,2016.63 ccw(c1256.71,2046.95) C23.2@1278.15,2025.51 ; 1256.71,2016.63 cw(c1256.71,1986.31) C23.2@1278.15,2007.75 ; 1256.71,2016.63 ccw(c1256.71,2046.95) C23.2@1278.15,2025.51 ; 1256.71,2016.63 cw(c1256.71,1986.31) C23.2@1278.15,2007.75 ; 1256.71,2016.63 ccw(c1256.71,2046.95) C23.2@1278.15,2025.51 ; 1256.71,2016.63 cw(c1256.71,1986.31) C23.2@1278.15,2007.75 ; 1256.71,2016.63 ccw(c1256.71,2046.95) C23.2@1278.15,2025.51 ; C1.1@2007.85,1795.49 cw(c2046.3,1757.03) 2046.3,1811.42 ; C1.1@2007.85,1795.49 cw(c2046.3,1757.03) 2046.3,1811.42 ; C1.1@2007.85,1795.49 cw(c2046.3,1757.03) 2046.3,1811.42 ; C1.1@2007.85,1795.49 cw(c2046.3,1757.03) 2046.3,1811.42 ; C1.1@2007.85,1795.49 cw(c2046.3,1757.03) 2046.3,1811.42 ; C1.1@2014.92,1788.42 cw(c2070.45,1732.89) U1.47@2070.45,1811.42 ; C1.1@2014.92,1788.42 cw(c2070.45,1732.89) U1.47@2070.45,1811.42 ; C1.1@2014.92,1788.42 cw(c2070.45,1732.89) U1.47@2070.45,1811.42 ; C1.1@2014.92,1788.42 cw(c2070.45,1732.89) U1.47@2070.45,1811.42 ; C1.1@2014.92,1788.42 cw(c2070.45,1732.89) U1.47@2070.45,1811.42 ; C1.1@2014.92,1820.32 ccw(c2036.42,1841.82) 2036.42,1811.42 ; C1.1@2014.92,1820.32 ccw(c2036.42,1841.82) 2036.42,1811.42 ; C1.1@2014.92,1820.32 ccw(c2036.42,1841.82) 2036.42,1811.42 ; C1.1@2014.92,1820.32 ccw(c2036.42,1841.82) 2036.42,1811.42 ; C1.1@2014.92,1820.32 ccw(c2036.42,1841.82) 2036.42,1811.42 ; C2.1@2083.18,2165.83 cw(c2102.73,2147.72) 2102.73,2174.37 ; C2.1@2083.18,2165.83 cw(c2102.73,2147.72) 2102.73,2174.37 ; C2.1@2083.18,2165.83 cw(c2102.73,2147.72) 2102.73,2174.37 ; C2.1@2083.18,2165.83 cw(c2102.73,2147.72) 2102.73,2174.37 ; C2.1@2083.18,2165.83 cw(c2102.73,2147.72) 2102.73,2174.37 ; C2.1@2083.18,2182.91 ccw(c2102.73,2201.02) 2102.73,2174.37 ; C2.1@2083.18,2182.91 ccw(c2102.73,2201.02) 2102.73,2174.37 ; C2.1@2083.18,2182.91 ccw(c2102.73,2201.02) 2102.73,2174.37 ; C2.1@2083.18,2182.91 ccw(c2102.73,2201.02) 2102.73,2174.37 ; C2.1@2083.18,2182.91 ccw(c2102.73,2201.02) 2102.73,2174.37 ; C2.1@2090.52,2159.04 cw(c2125.63,2126.5) 2125.63,2174.37 ; C2.1@2090.52,2159.04 cw(c2125.63,2126.5) 2125.63,2174.37 ; C2.1@2090.52,2159.04 cw(c2125.63,2126.5) 2125.63,2174.37 ; C2.1@2090.52,2159.04 cw(c2125.63,2126.5) 2125.63,2174.37 ; C2.1@2090.52,2159.04 cw(c2125.63,2126.5) 2125.63,2174.37 ; C2.1@2090.52,2189.7 ccw(c2125.63,2222.24) 2125.63,2174.37 ; C2.1@2090.52,2189.7 ccw(c2125.63,2222.24) 2125.63,2174.37 ; C2.1@2090.52,2189.7 ccw(c2125.63,2222.24) 2125.63,2174.37 ; C2.1@2090.52,2189.7 ccw(c2125.63,2222.24) 2125.63,2174.37 ; C2.1@2090.52,2189.7 ccw(c2125.63,2222.24) 2125.63,2174.37 ; 2350,1567 cw(c2350,1528) C4.1@2380.18,1552.71 ; 2350,1567 ccw(c2350,1606) C4.1@2380.18,1581.29 ; 2350,1567 cw(c2350,1528) C4.1@2380.18,1552.71 ; 2350,1567 ccw(c2350,1606) C4.1@2380.18,1581.29 ; 2350,1567 cw(c2350,1528) C4.1@2380.18,1552.71 ; 2350,1567 ccw(c2350,1606) C4.1@2380.18,1581.29 ; 2350,1567 cw(c2350,1528) C4.1@2380.18,1552.71 ; 2350,1567 ccw(c2350,1606) C4.1@2380.18,1581.29 ; 2350,1567 cw(c2350,1528) C4.1@2380.18,1552.71 ; 2350,1567 ccw(c2350,1606) C4.1@2380.18,1581.29 ; 2506.5,2045.13 cw(c2548.37,2003.26) C3.1@2548.37,2062.47 ; 2506.5,2045.13 cw(c2548.37,2003.26) C3.1@2548.37,2062.47 ; 2506.5,2045.13 cw(c2548.37,2003.26) C3.1@2548.37,2062.47 ; 2506.5,2045.13 cw(c2548.37,2003.26) C3.1@2548.37,2062.47 ; 2506.5,2045.13 cw(c2548.37,2003.26) C3.1@2548.37,2062.47 ; 2511.25,2049.88 ccw(c2476.1,2085.03) C3.1@2525.81,2085.03 ; 2511.25,2049.88 ccw(c2476.1,2085.03) C3.1@2525.81,2085.03 ; 2511.25,2049.88 ccw(c2476.1,2085.03) C3.1@2525.81,2085.03 ; 2511.25,2049.88 ccw(c2476.1,2085.03) C3.1@2525.81,2085.03 ; 2511.25,2049.88 ccw(c2476.1,2085.03) C3.1@2525.81,2085.03 ; 2514.64,2053.44 ccw(c2503.33,2095.67) C3.1@2545.88,2085.62 ; 2514.64,2053.44 ccw(c2503.33,2095.67) C3.1@2545.88,2085.62 ; 2514.64,2053.44 ccw(c2503.33,2095.67) C3.1@2545.88,2085.62 ; 2514.64,2053.44 ccw(c2503.33,2095.67) C3.1@2545.88,2085.62 ; 2514.64,2053.44 ccw(c2503.33,2095.67) C3.1@2545.88,2085.62 ; 2514.64,2053.44 ccw(c2503.33,2095.67) C3.1@2545.88,2085.62 ; 2514.64,2053.44 ccw(c2503.33,2095.67) C3.1@2545.88,2085.62 ; 2514.64,2053.44 ccw(c2503.33,2095.67) C3.1@2545.88,2085.62 ; 2514.64,2053.44 ccw(c2503.33,2095.67) C3.1@2545.88,2085.62 ; 2514.64,2053.44 ccw(c2503.33,2095.67) C3.1@2545.88,2085.62 ; C3.1@2521.52,2069.01 cw(c2552.56,2060.69) C3.1@2547.11,2092.36 ; C3.1@2521.52,2069.01 cw(c2552.56,2060.69) C3.1@2547.11,2092.36 ; C3.1@2521.52,2069.01 cw(c2552.56,2060.69) C3.1@2547.11,2092.36 ; C3.1@2521.52,2069.01 cw(c2552.56,2060.69) C3.1@2547.11,2092.36 ; C3.1@2521.52,2069.01 cw(c2552.56,2060.69) C3.1@2547.11,2092.36 ; C3.1@2521.52,2069.01 cw(c2552.56,2060.69) C3.1@2547.11,2092.36 ; C3.1@2521.52,2069.01 cw(c2552.56,2060.69) C3.1@2547.11,2092.36 ; C3.1@2521.52,2069.01 cw(c2552.56,2060.69) C3.1@2547.11,2092.36 ; C3.1@2521.52,2069.01 cw(c2552.56,2060.69) C3.1@2547.11,2092.36 ; C3.1@2521.52,2069.01 cw(c2552.56,2060.69) C3.1@2547.11,2092.36 ; C3.1@2523.57,2062.2 cw(c2548.37,2037.4) C3.1@2548.37,2072.47 ; C3.1@2523.57,2062.2 cw(c2548.37,2037.4) C3.1@2548.37,2072.47 ; C3.1@2523.57,2062.2 cw(c2548.37,2037.4) C3.1@2548.37,2072.47 ; C3.1@2523.57,2062.2 cw(c2548.37,2037.4) C3.1@2548.37,2072.47 ; C3.1@2523.57,2062.2 cw(c2548.37,2037.4) C3.1@2548.37,2072.47 ; C3.1@2530.81,2057.77 ccw(c2521.83,2091.3) C3.1@2555.61,2083.32 ; C3.1@2530.81,2057.77 ccw(c2521.83,2091.3) C3.1@2555.61,2083.32 ; C3.1@2530.81,2057.77 ccw(c2521.83,2091.3) C3.1@2555.61,2083.32 ; C3.1@2530.81,2057.77 ccw(c2521.83,2091.3) C3.1@2555.61,2083.32 ; C3.1@2530.81,2057.77 ccw(c2521.83,2091.3) C3.1@2555.61,2083.32 ; C3.1@2530.81,2057.77 ccw(c2521.83,2091.3) C3.1@2555.61,2083.32 ; C3.1@2530.81,2057.77 ccw(c2521.83,2091.3) C3.1@2555.61,2083.32 ; C3.1@2530.81,2057.77 ccw(c2521.83,2091.3) C3.1@2555.61,2083.32 ; C3.1@2530.81,2057.77 ccw(c2521.83,2091.3) C3.1@2555.61,2083.32 ; C3.1@2530.81,2057.77 ccw(c2521.83,2091.3) C3.1@2555.61,2083.32 ; P6.31@3238.62,851.93 cw(c3263.42,827.13) 3263.42,862.2 ; P6.31@3238.62,851.93 cw(c3263.42,827.13) 3263.42,862.2 ; P6.31@3238.62,851.93 cw(c3263.42,827.13) 3263.42,862.2 ; P6.31@3238.62,851.93 cw(c3263.42,827.13) 3263.42,862.2 ; P6.31@3238.62,851.93 cw(c3263.42,827.13) 3263.42,862.2 ; P6.31@3238.62,872.48 ccw(c3263.42,897.28) 3263.42,862.2 ; P6.31@3238.62,872.48 ccw(c3263.42,897.28) 3263.42,862.2 ; P6.31@3238.62,872.48 ccw(c3263.42,897.28) 3263.42,862.2 ; P6.31@3238.62,872.48 ccw(c3263.42,897.28) 3263.42,862.2 ; P6.31@3238.62,872.48 ccw(c3263.42,897.28) 3263.42,862.2 ; P6.31@3245.69,844.86 cw(c3287.56,802.99) 3287.56,862.2 ; P6.31@3245.69,844.86 cw(c3287.56,802.99) 3287.56,862.2 ; P6.31@3245.69,844.86 cw(c3287.56,802.99) 3287.56,862.2 ; P6.31@3245.69,844.86 cw(c3287.56,802.99) 3287.56,862.2 ; P6.31@3245.69,844.86 cw(c3287.56,802.99) 3287.56,862.2 ; P6.31@3245.69,879.55 ccw(c3287.56,921.42) 3287.56,862.2 ; P6.31@3245.69,879.55 ccw(c3287.56,921.42) 3287.56,862.2 ; P6.31@3245.69,879.55 ccw(c3287.56,921.42) 3287.56,862.2 ; P6.31@3245.69,879.55 ccw(c3287.56,921.42) 3287.56,862.2 ; P6.31@3245.69,879.55 ccw(c3287.56,921.42) 3287.56,862.2 ; 3269.13,862.2 cw(c3269.13,802.99) P6.32@3311,844.86 ; 3269.13,862.2 ccw(c3269.13,921.42) P6.32@3311,879.55 ; 3269.13,862.2 cw(c3269.13,802.99) P6.32@3311,844.86 ; 3269.13,862.2 ccw(c3269.13,921.42) P6.32@3311,879.55 ; 3269.13,862.2 cw(c3269.13,802.99) P6.32@3311,844.86 ; 3269.13,862.2 ccw(c3269.13,921.42) P6.32@3311,879.55 ; 3269.13,862.2 cw(c3269.13,802.99) P6.32@3311,844.86 ; 3269.13,862.2 ccw(c3269.13,921.42) P6.32@3311,879.55 ; 3269.13,862.2 cw(c3269.13,802.99) P6.32@3311,844.86 ; 3269.13,862.2 ccw(c3269.13,921.42) P6.32@3311,879.55 ; 3293.27,862.2 cw(c3293.27,827.13) P6.32@3318.07,851.93 ; 3293.27,862.2 ccw(c3293.27,897.28) P6.32@3318.07,872.48 ; 3293.27,862.2 cw(c3293.27,827.13) P6.32@3318.07,851.93 ; 3293.27,862.2 ccw(c3293.27,897.28) P6.32@3318.07,872.48 ; 3293.27,862.2 cw(c3293.27,827.13) P6.32@3318.07,851.93 ; 3293.27,862.2 ccw(c3293.27,897.28) P6.32@3318.07,872.48 ; 3293.27,862.2 cw(c3293.27,827.13) P6.32@3318.07,851.93 ; 3293.27,862.2 ccw(c3293.27,897.28) P6.32@3318.07,872.48 ; 3293.27,862.2 cw(c3293.27,827.13) P6.32@3318.07,851.93 ; 3293.27,862.2 ccw(c3293.27,897.28) P6.32@3318.07,872.48
  Bottom Layer w10: C18.2@594.63,2118 C19.2@594.63,2218 ; C9.2@638,1679.63 C15.2@731,1679.63 ; U3.18@2626.97,2596.46 2626.97,2647.97 ; v2@2646,2662 v2(2645,2662) 2641,2662 2626.97,2647.97 ; U3.21@2703.74,2596.46 2703.74,2638.74 2718,2653 ; U3.26@2831.69,2596.46 2831.69,2654.69 2842.52,2665.52 ; C5.2@2842.52,2712.6 2842.52,2665.52 ; C18.2@578.68,2135.92 ccw(c540.17,2174.43) 594.63,2174.43 ; C18.2@578.68,2135.92 ccw(c540.17,2174.43) 594.63,2174.43 ; C18.2@578.68,2135.92 ccw(c540.17,2174.43) 594.63,2174.43 ; C18.2@578.68,2135.92 ccw(c540.17,2174.43) 594.63,2174.43 ; C18.2@578.68,2135.92 ccw(c540.17,2174.43) 594.63,2174.43 ; C19.2@578.68,2200.08 cw(c540.17,2161.57) 594.63,2161.57 ; C19.2@578.68,2200.08 cw(c540.17,2161.57) 594.63,2161.57 ; C19.2@578.68,2200.08 cw(c540.17,2161.57) 594.63,2161.57 ; C19.2@578.68,2200.08 cw(c540.17,2161.57) 594.63,2161.57 ; C19.2@578.68,2200.08 cw(c540.17,2161.57) 594.63,2161.57 ; C18.2@585.75,2128.85 ccw(c564.31,2150.29) 594.63,2150.29 ; C18.2@585.75,2128.85 ccw(c564.31,2150.29) 594.63,2150.29 ; C18.2@585.75,2128.85 ccw(c564.31,2150.29) 594.63,2150.29 ; C18.2@585.75,2128.85 ccw(c564.31,2150.29) 594.63,2150.29 ; C18.2@585.75,2128.85 ccw(c564.31,2150.29) 594.63,2150.29 ; C19.2@585.75,2207.15 cw(c564.31,2185.71) 594.63,2185.71 ; C19.2@585.75,2207.15 cw(c564.31,2185.71) 594.63,2185.71 ; C19.2@585.75,2207.15 cw(c564.31,2185.71) 594.63,2185.71 ; C19.2@585.75,2207.15 cw(c564.31,2185.71) 594.63,2185.71 ; C19.2@585.75,2207.15 cw(c564.31,2185.71) 594.63,2185.71 ; 594.63,2150.29 ccw(c624.95,2150.29) C18.2@603.51,2128.85 ; 594.63,2150.29 ccw(c624.95,2150.29) C18.2@603.51,2128.85 ; 594.63,2150.29 ccw(c624.95,2150.29) C18.2@603.51,2128.85 ; 594.63,2150.29 ccw(c624.95,2150.29) C18.2@603.51,2128.85 ; 594.63,2150.29 ccw(c624.95,2150.29) C18.2@603.51,2128.85 ; 594.63,2161.57 cw(c649.09,2161.57) C19.2@610.58,2200.08 ; 594.63,2161.57 cw(c649.09,2161.57) C19.2@610.58,2200.08 ; 594.63,2161.57 cw(c649.09,2161.57) C19.2@610.58,2200.08 ; 594.63,2161.57 cw(c649.09,2161.57) C19.2@610.58,2200.08 ; 594.63,2161.57 cw(c649.09,2161.57) C19.2@610.58,2200.08 ; 594.63,2174.43 ccw(c649.09,2174.43) C18.2@610.58,2135.92 ; 594.63,2174.43 ccw(c649.09,2174.43) C18.2@610.58,2135.92 ; 594.63,2174.43 ccw(c649.09,2174.43) C18.2@610.58,2135.92 ; 594.63,2174.43 ccw(c649.09,2174.43) C18.2@610.58,2135.92 ; 594.63,2174.43 ccw(c649.09,2174.43) C18.2@610.58,2135.92 ; 594.63,2185.71 cw(c624.95,2185.71) C19.2@603.51,2207.15 ; 594.63,2185.71 cw(c624.95,2185.71) C19.2@603.51,2207.15 ; 594.63,2185.71 cw(c624.95,2185.71) C19.2@603.51,2207.15 ; 594.63,2185.71 cw(c624.95,2185.71) C19.2@603.51,2207.15 ; 594.63,2185.71 cw(c624.95,2185.71) C19.2@603.51,2207.15 ; C9.2@648.85,1670.75 cw(c670.29,1649.31) 670.29,1679.63 ; C9.2@648.85,1670.75 cw(c670.29,1649.31) 670.29,1679.63 ; C9.2@648.85,1670.75 cw(c670.29,1649.31) 670.29,1679.63 ; C9.2@648.85,1670.75 cw(c670.29,1649.31) 670.29,1679.63 ; C9.2@648.85,1670.75 cw(c670.29,1649.31) 670.29,1679.63 ; C9.2@648.85,1688.51 ccw(c670.29,1709.95) 670.29,1679.63 ; C9.2@648.85,1688.51 ccw(c670.29,1709.95) 670.29,1679.63 ; C9.2@648.85,1688.51 ccw(c670.29,1709.95) 670.29,1679.63 ; C9.2@648.85,1688.51 ccw(c670.29,1709.95) 670.29,1679.63 ; C9.2@648.85,1688.51 ccw(c670.29,1709.95) 670.29,1679.63 ; C9.2@655.92,1663.68 cw(c694.43,1625.17) 694.43,1679.63 ; C9.2@655.92,1663.68 cw(c694.43,1625.17) 694.43,1679.63 ; C9.2@655.92,1663.68 cw(c694.43,1625.17) 694.43,1679.63 ; C9.2@655.92,1663.68 cw(c694.43,1625.17) 694.43,1679.63 ; C9.2@655.92,1663.68 cw(c694.43,1625.17) 694.43,1679.63 ; C9.2@655.92,1695.58 ccw(c694.43,1734.09) 694.43,1679.63 ; C9.2@655.92,1695.58 ccw(c694.43,1734.09) 694.43,1679.63 ; C9.2@655.92,1695.58 ccw(c694.43,1734.09) 694.43,1679.63 ; C9.2@655.92,1695.58 ccw(c694.43,1734.09) 694.43,1679.63 ; C9.2@655.92,1695.58 ccw(c694.43,1734.09) 694.43,1679.63 ; 674.57,1679.63 cw(c674.57,1625.17) C15.2@713.08,1663.68 ; 674.57,1679.63 ccw(c674.57,1734.09) C15.2@713.08,1695.58 ; 674.57,1679.63 cw(c674.57,1625.17) C15.2@713.08,1663.68 ; 674.57,1679.63 ccw(c674.57,1734.09) C15.2@713.08,1695.58 ; 674.57,1679.63 cw(c674.57,1625.17) C15.2@713.08,1663.68 ; 674.57,1679.63 ccw(c674.57,1734.09) C15.2@713.08,1695.58 ; 674.57,1679.63 cw(c674.57,1625.17) C15.2@713.08,1663.68 ; 674.57,1679.63 ccw(c674.57,1734.09) C15.2@713.08,1695.58 ; 674.57,1679.63 cw(c674.57,1625.17) C15.2@713.08,1663.68 ; 674.57,1679.63 ccw(c674.57,1734.09) C15.2@713.08,1695.58 ; 698.71,1679.63 cw(c698.71,1649.31) C15.2@720.15,1670.75 ; 698.71,1679.63 ccw(c698.71,1709.95) C15.2@720.15,1688.51 ; 698.71,1679.63 cw(c698.71,1649.31) C15.2@720.15,1670.75 ; 698.71,1679.63 ccw(c698.71,1709.95) C15.2@720.15,1688.51 ; 698.71,1679.63 cw(c698.71,1649.31) C15.2@720.15,1670.75 ; 698.71,1679.63 ccw(c698.71,1709.95) C15.2@720.15,1688.51 ; 698.71,1679.63 cw(c698.71,1649.31) C15.2@720.15,1670.75 ; 698.71,1679.63 ccw(c698.71,1709.95) C15.2@720.15,1688.51 ; 698.71,1679.63 cw(c698.71,1649.31) C15.2@720.15,1670.75 ; 698.71,1679.63 ccw(c698.71,1709.95) C15.2@720.15,1688.51 ; 2626.97,2647.97 cw(c2635.4,2639.54) 2640.09,2650.5 ccw(c2635.4,2639.54) 2626.97,2647.97 ; 2626.97,2647.97 ccw(c2613.61,2661.34) 2632.5,2661.74 cw(c2613.61,2661.34) 2626.97,2647.97 ; C5.2@2828.99,2692.58 cw(c2808.7,2665.52) 2842.52,2665.52 ; C5.2@2828.99,2692.58 cw(c2808.7,2665.52) 2842.52,2665.52 ; C5.2@2828.99,2692.58 cw(c2808.7,2665.52) 2842.52,2665.52 ; C5.2@2828.99,2692.58 cw(c2808.7,2665.52) 2842.52,2665.52 ; C5.2@2828.99,2692.58 cw(c2808.7,2665.52) 2842.52,2665.52 ; 2842.52,2665.52 cw(c2876.34,2665.52) C5.2@2856.05,2692.58 ; 2842.52,2665.52 cw(c2876.34,2665.52) C5.2@2856.05,2692.58 ; 2842.52,2665.52 cw(c2876.34,2665.52) C5.2@2856.05,2692.58 ; 2842.52,2665.52 cw(c2876.34,2665.52) C5.2@2856.05,2692.58 ; 2842.52,2665.52 cw(c2876.34,2665.52) C5.2@2856.05,2692.58
  other v1: 1600,200 2000,200 2400,200 3400,200 700,400 1700,400 2300,400 2500,400 2700,400 2900,400 3100,400 3300,400 3500,400 200,600 400,600 600,600 1000,600 1800,600 2000,600 2200,600 2400,600 2600,600 2800,600 3000,600 3200,600 3400,600 300,800 700,800 900,800 1700,800 2100,800 2500,800 2700,800 2900,800 3100,800 3500,800 600,1000 2200,1000 2400,1000 2800,1000 3000,1000 3400,1000 300,1200 500,1200 700,1200 1900,1200 2100,1200 2300,1200 2700,1200 2900,1200 3100,1200 3500,1200 200,1400 600,1400 800,1400 1600,1400 2000,1400 2400,1400 2600,1400 2800,1400 3000,1400 3400,1400 300,1600 500,1600 700,1600 1300,1600 1500,1600 2100,1600 3500,1600 1400,1800 1600,1800 1800,1800 2200,1800 2800,1800 3000,1800 3400,1800 1500,2000 1700,2000 3500,2000 200,2200 400,2200 1400,2200 1600,2200 2400,2200 3000,2200 3400,2200 2100,2400 2900,2400 3100,2400 3500,2400 200,2600 400,2600 1400,2600 1600,2600 1800,2600 2400,2600 3000,2600 3200,2600 3400,2600 300,2800 500,2800 2500,2800 2900,2800 3100,2800 3500,2800 200,3000 400,3000 600,3000 2200,3000 2400,3000 3000,3000 3200,3000 3400,3000
IAMS: C26.1 J2.1 U4.6 | length 1325.3
  Top Layer w10: 607,1888 667.79,1948.79 U4.6@758.72,1948.79
  Top Layer w30: J2.1@339,1728 339,1832.37 C26.1@338.37,1833 552,1833 607,1888 ; J2.1@328.73,1738.27 ccw(c303.93,1763.07) 339,1763.07 ; J2.1@328.73,1738.27 ccw(c303.93,1763.07) 339,1763.07 ; J2.1@328.73,1738.27 ccw(c303.93,1763.07) 339,1763.07 ; J2.1@328.73,1738.27 ccw(c303.93,1763.07) 339,1763.07 ; J2.1@328.73,1738.27 ccw(c303.93,1763.07) 339,1763.07 ; C26.1@329.49,1822.15 cw(c306.53,1799.19) 339,1799.19 ; C26.1@329.49,1822.15 cw(c306.53,1799.19) 339,1799.19 ; C26.1@329.49,1822.15 cw(c306.53,1799.19) 339,1799.19 ; C26.1@329.49,1822.15 cw(c306.53,1799.19) 339,1799.19 ; C26.1@329.49,1822.15 cw(c306.53,1799.19) 339,1799.19 ; 339,1763.07 ccw(c374.07,1763.07) J2.1@349.27,1738.27 ; 339,1763.07 ccw(c374.07,1763.07) J2.1@349.27,1738.27 ; 339,1763.07 ccw(c374.07,1763.07) J2.1@349.27,1738.27 ; 339,1763.07 ccw(c374.07,1763.07) J2.1@349.27,1738.27 ; 339,1763.07 ccw(c374.07,1763.07) J2.1@349.27,1738.27 ; 339,1802.23 cw(c367.17,1802.23) C26.1@347.25,1822.15 ; 339,1802.23 cw(c367.17,1802.23) C26.1@347.25,1822.15 ; 339,1802.23 cw(c367.17,1802.23) C26.1@347.25,1822.15 ; 339,1802.23 cw(c367.17,1802.23) C26.1@347.25,1822.15 ; 339,1802.23 cw(c367.17,1802.23) C26.1@347.25,1822.15 ; C26.1@347.25,1824.12 cw(c368.69,1802.68) 368.69,1833 ; C26.1@347.25,1824.12 cw(c368.69,1802.68) 368.69,1833 ; C26.1@347.25,1824.12 cw(c368.69,1802.68) 368.69,1833 ; C26.1@347.25,1824.12 cw(c368.69,1802.68) 368.69,1833 ; C26.1@347.25,1824.12 cw(c368.69,1802.68) 368.69,1833 ; C26.1@347.25,1841.88 ccw(c368.69,1863.32) 368.69,1833 ; C26.1@347.25,1841.88 ccw(c368.69,1863.32) 368.69,1833 ; C26.1@347.25,1841.88 ccw(c368.69,1863.32) 368.69,1833 ; C26.1@347.25,1841.88 ccw(c368.69,1863.32) 368.69,1833 ; C26.1@347.25,1841.88 ccw(c368.69,1863.32) 368.69,1833